# Altium PCB PCB1.PcbDoc
Units mm, origin at the board's own origin, x right, y up, seen from the top; angles counter-clockwise.
Board outline 40.5 x 40.25 mm, 4 copper layers (Component Side, Ground Plane, Power Plane, Solder Side), stack 0.844 mm thick; 26 components, 70 nets, 254 pads, 56 vias.
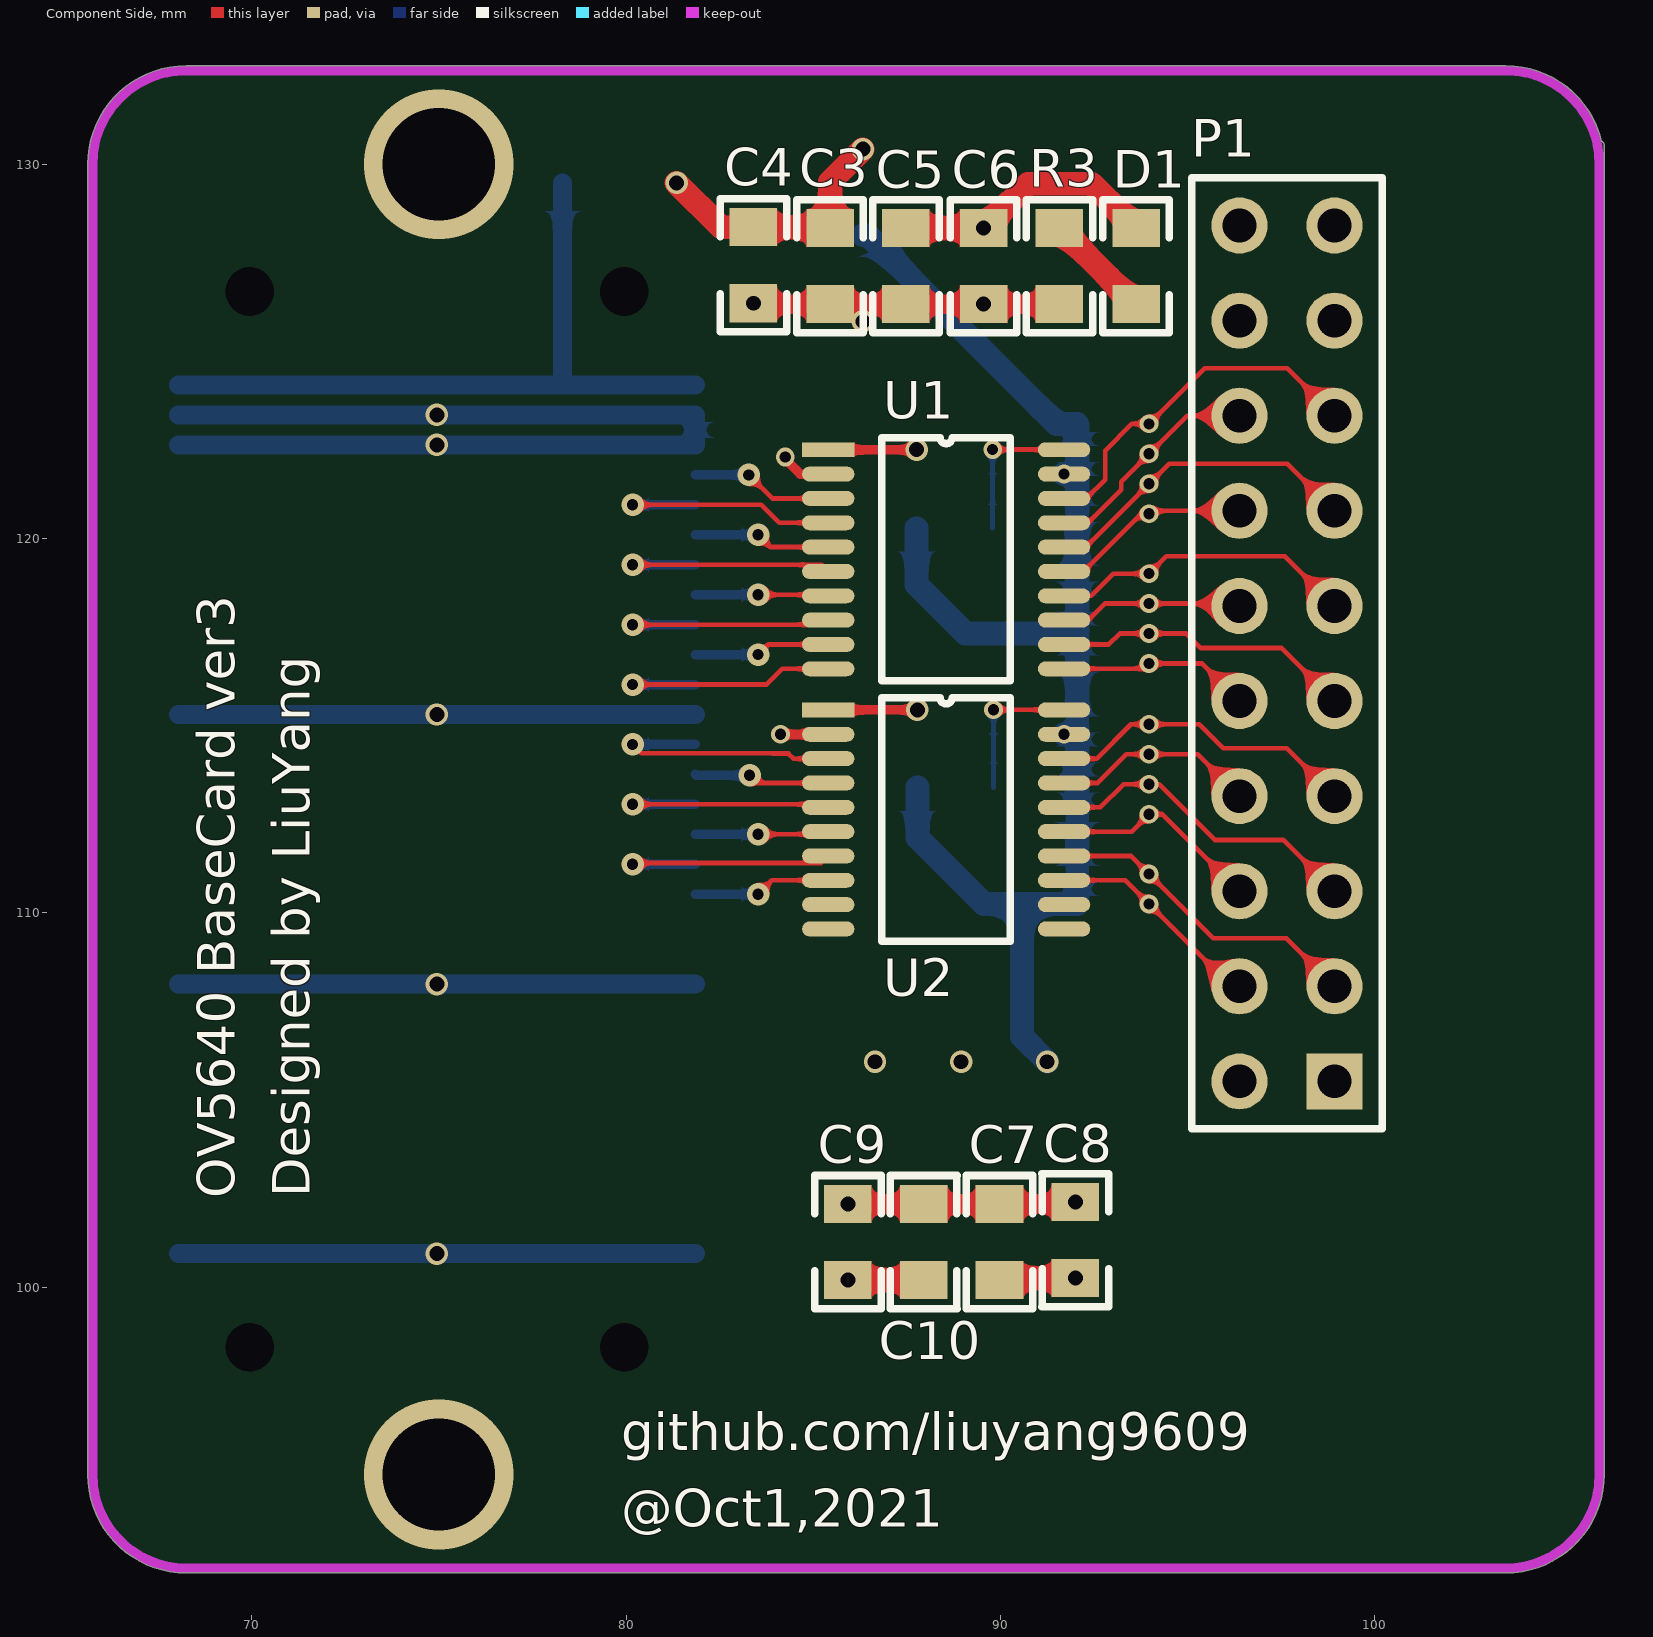
[diagram p0: Component Side view]
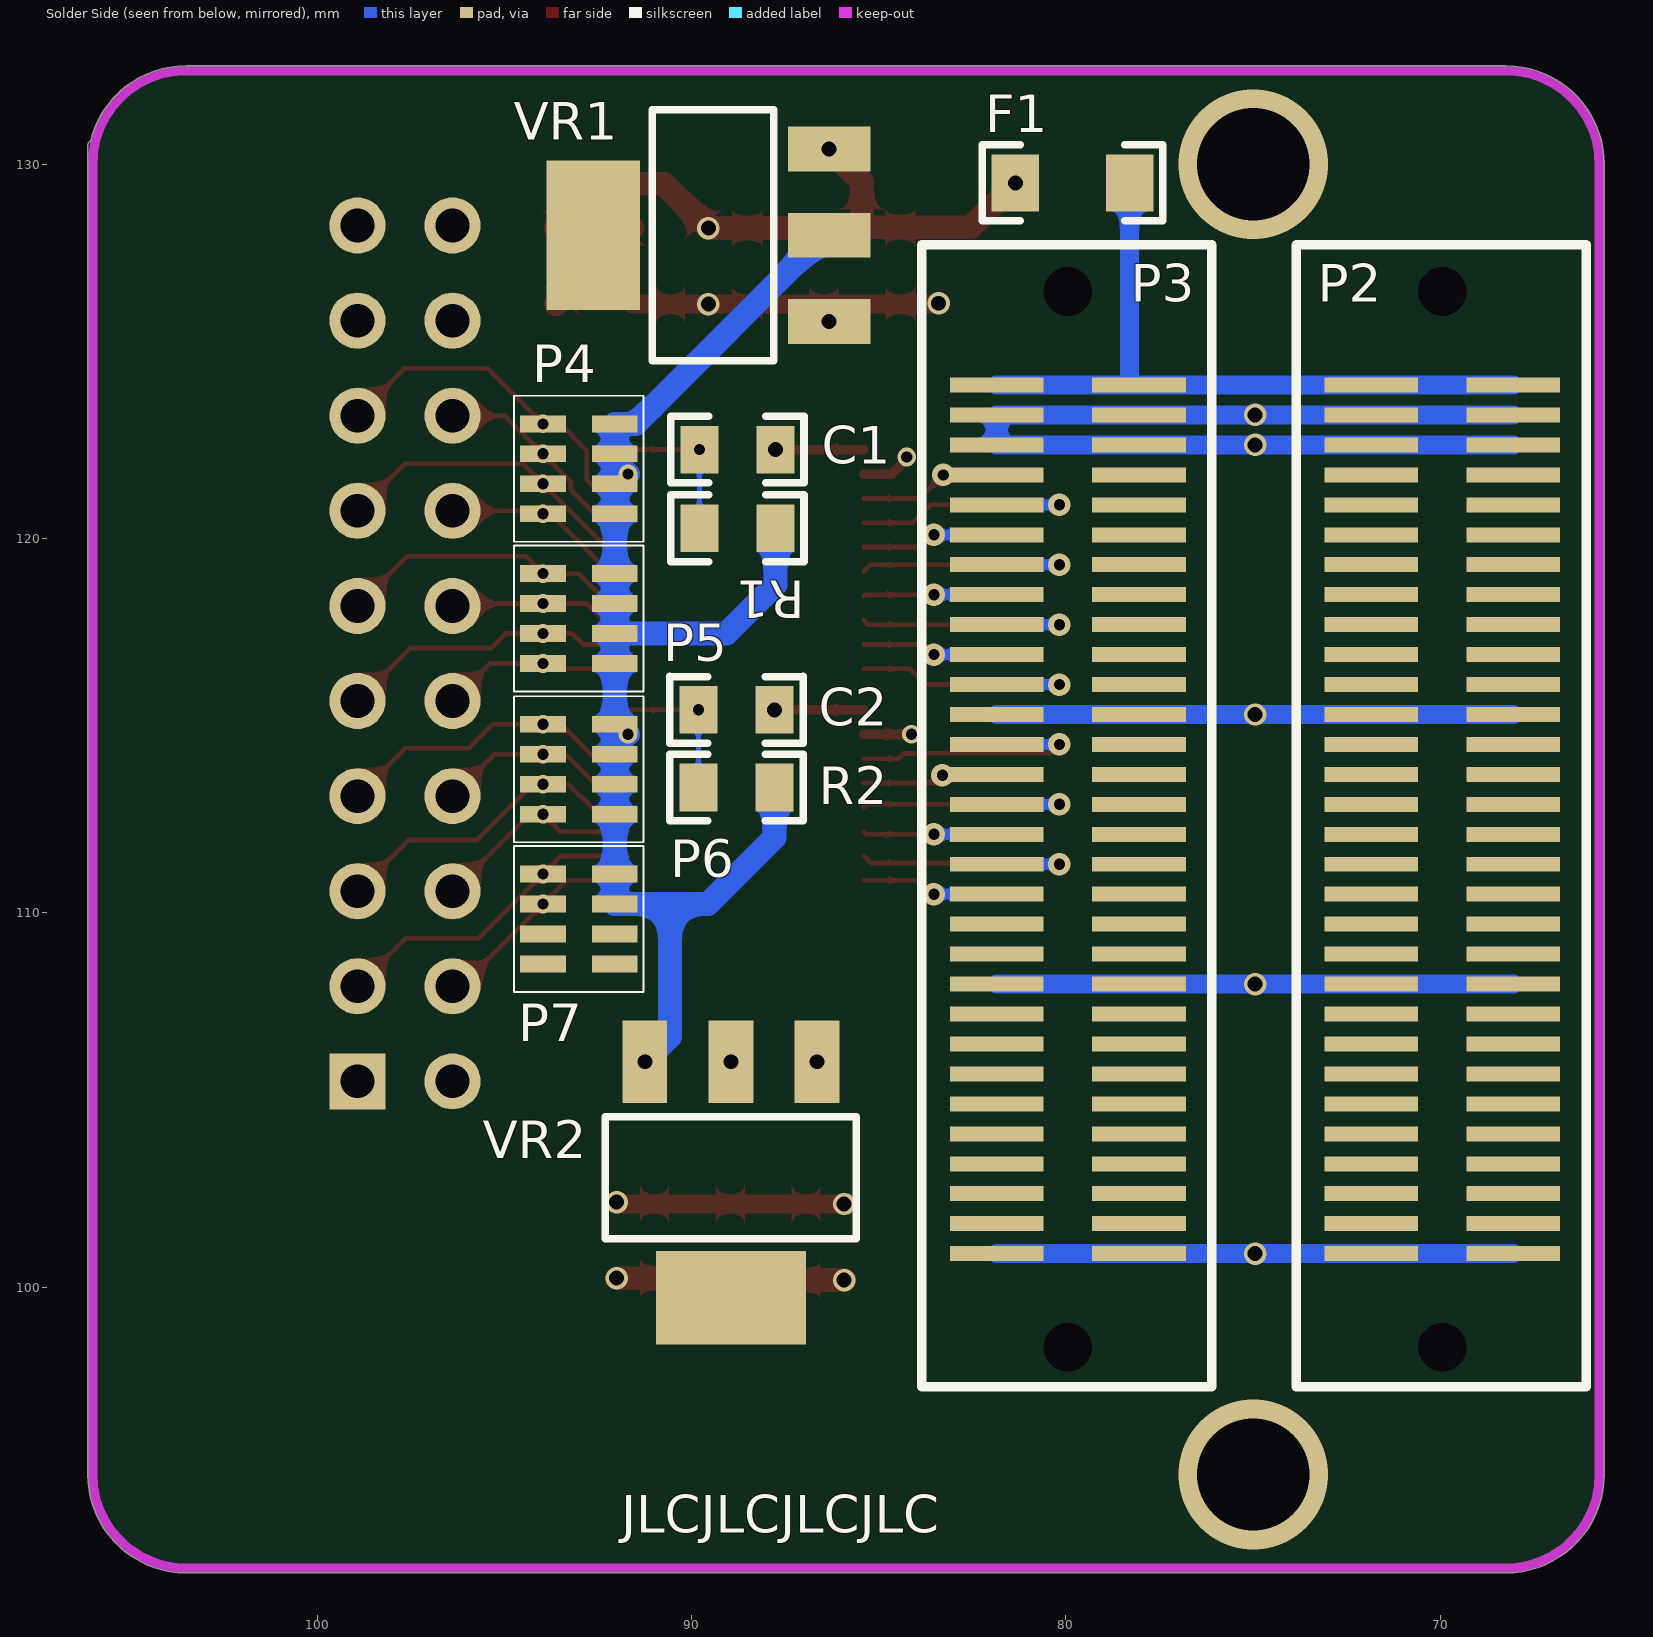
[diagram p1: Solder Side view, seen from below]
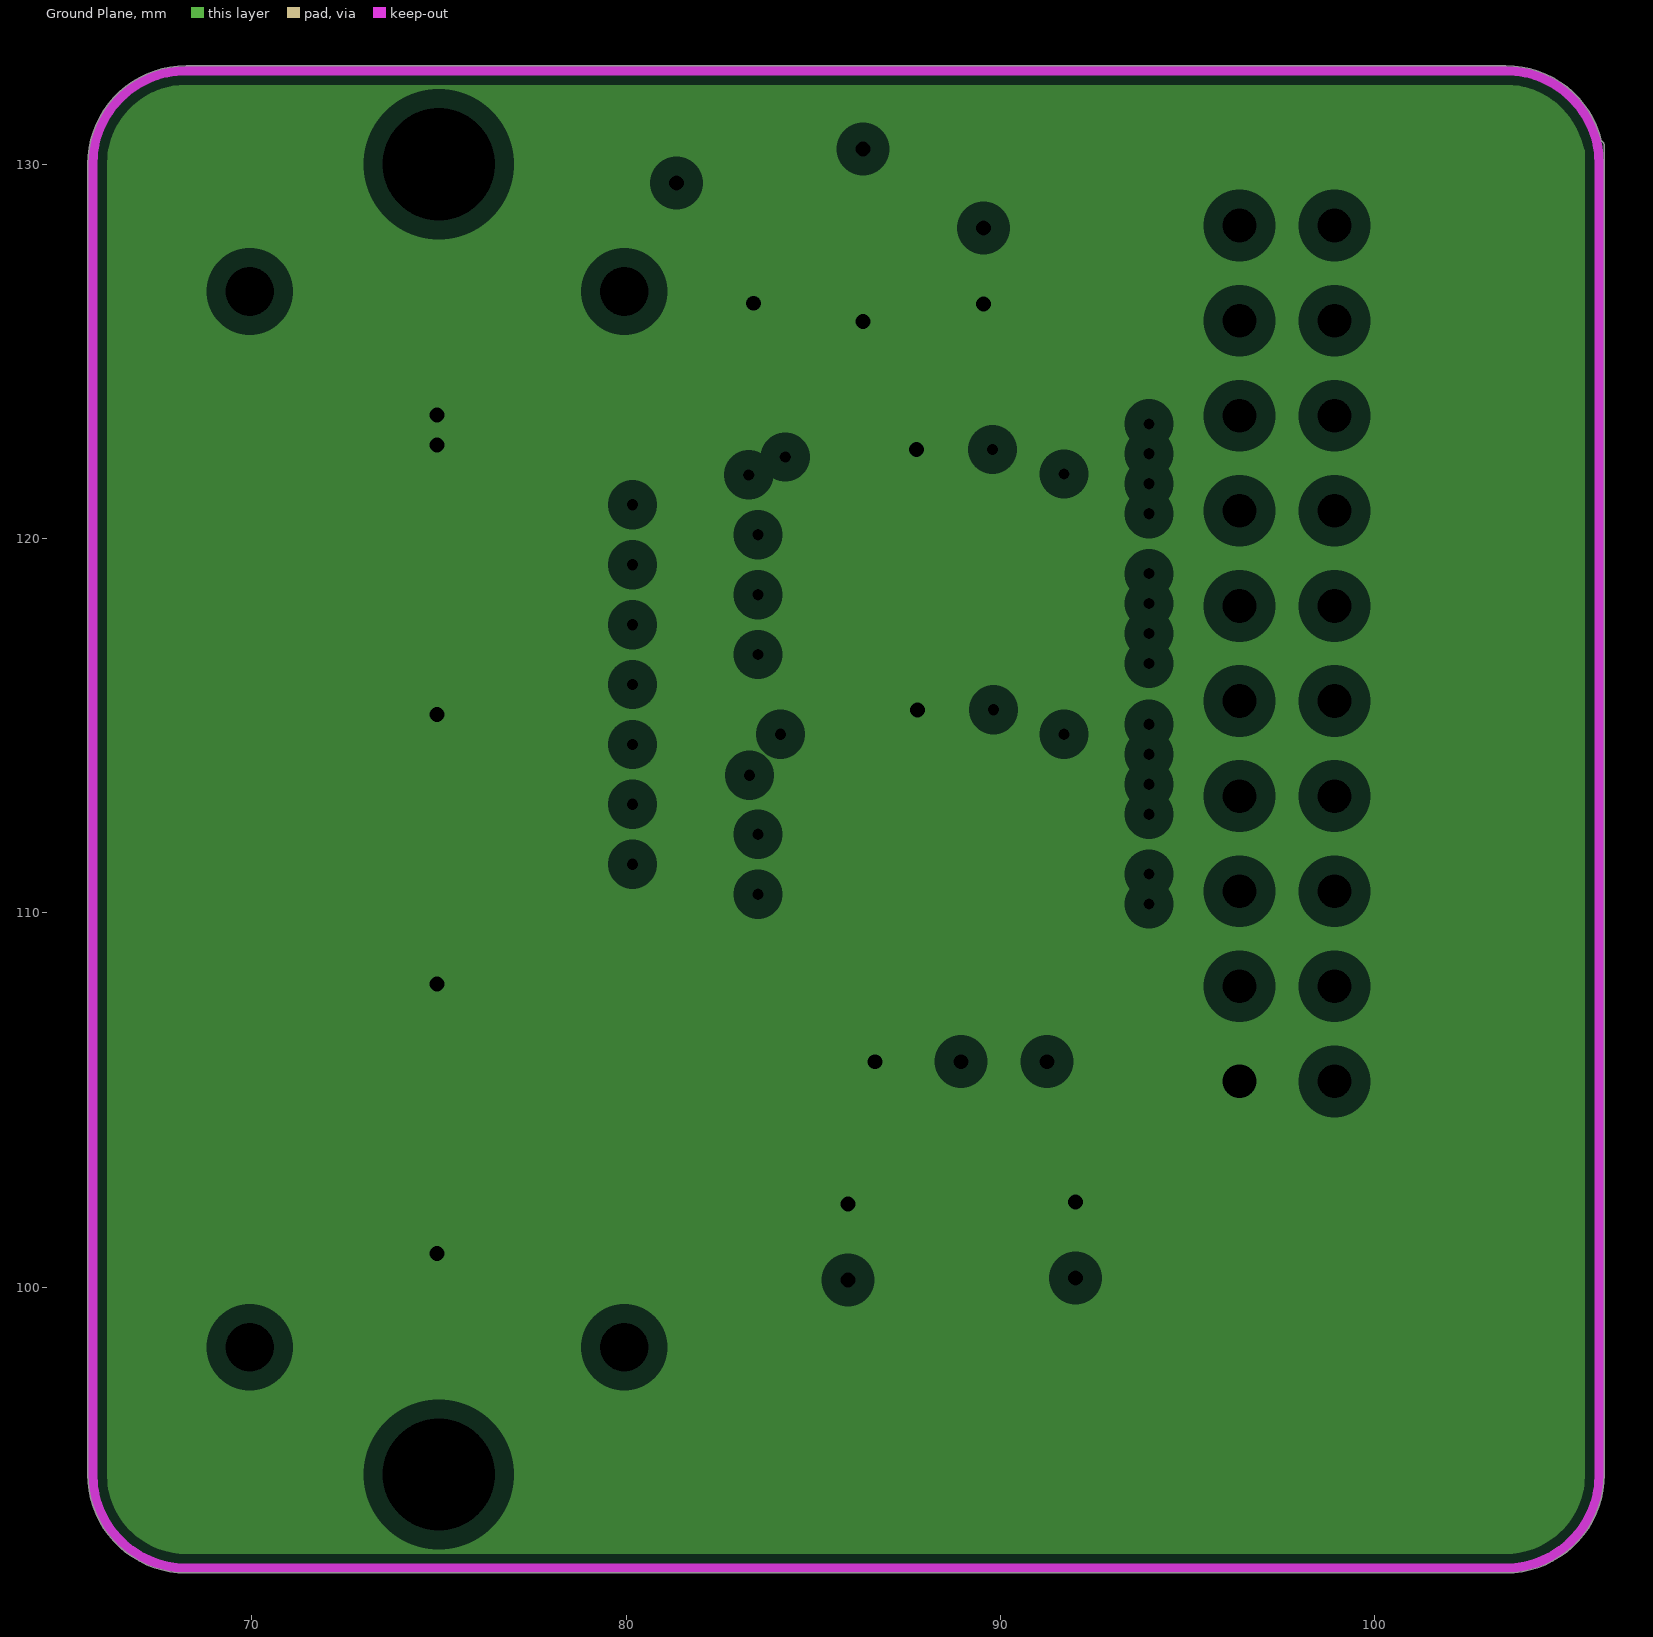
[diagram p2: Ground Plane, clearances drawn from the general rule]
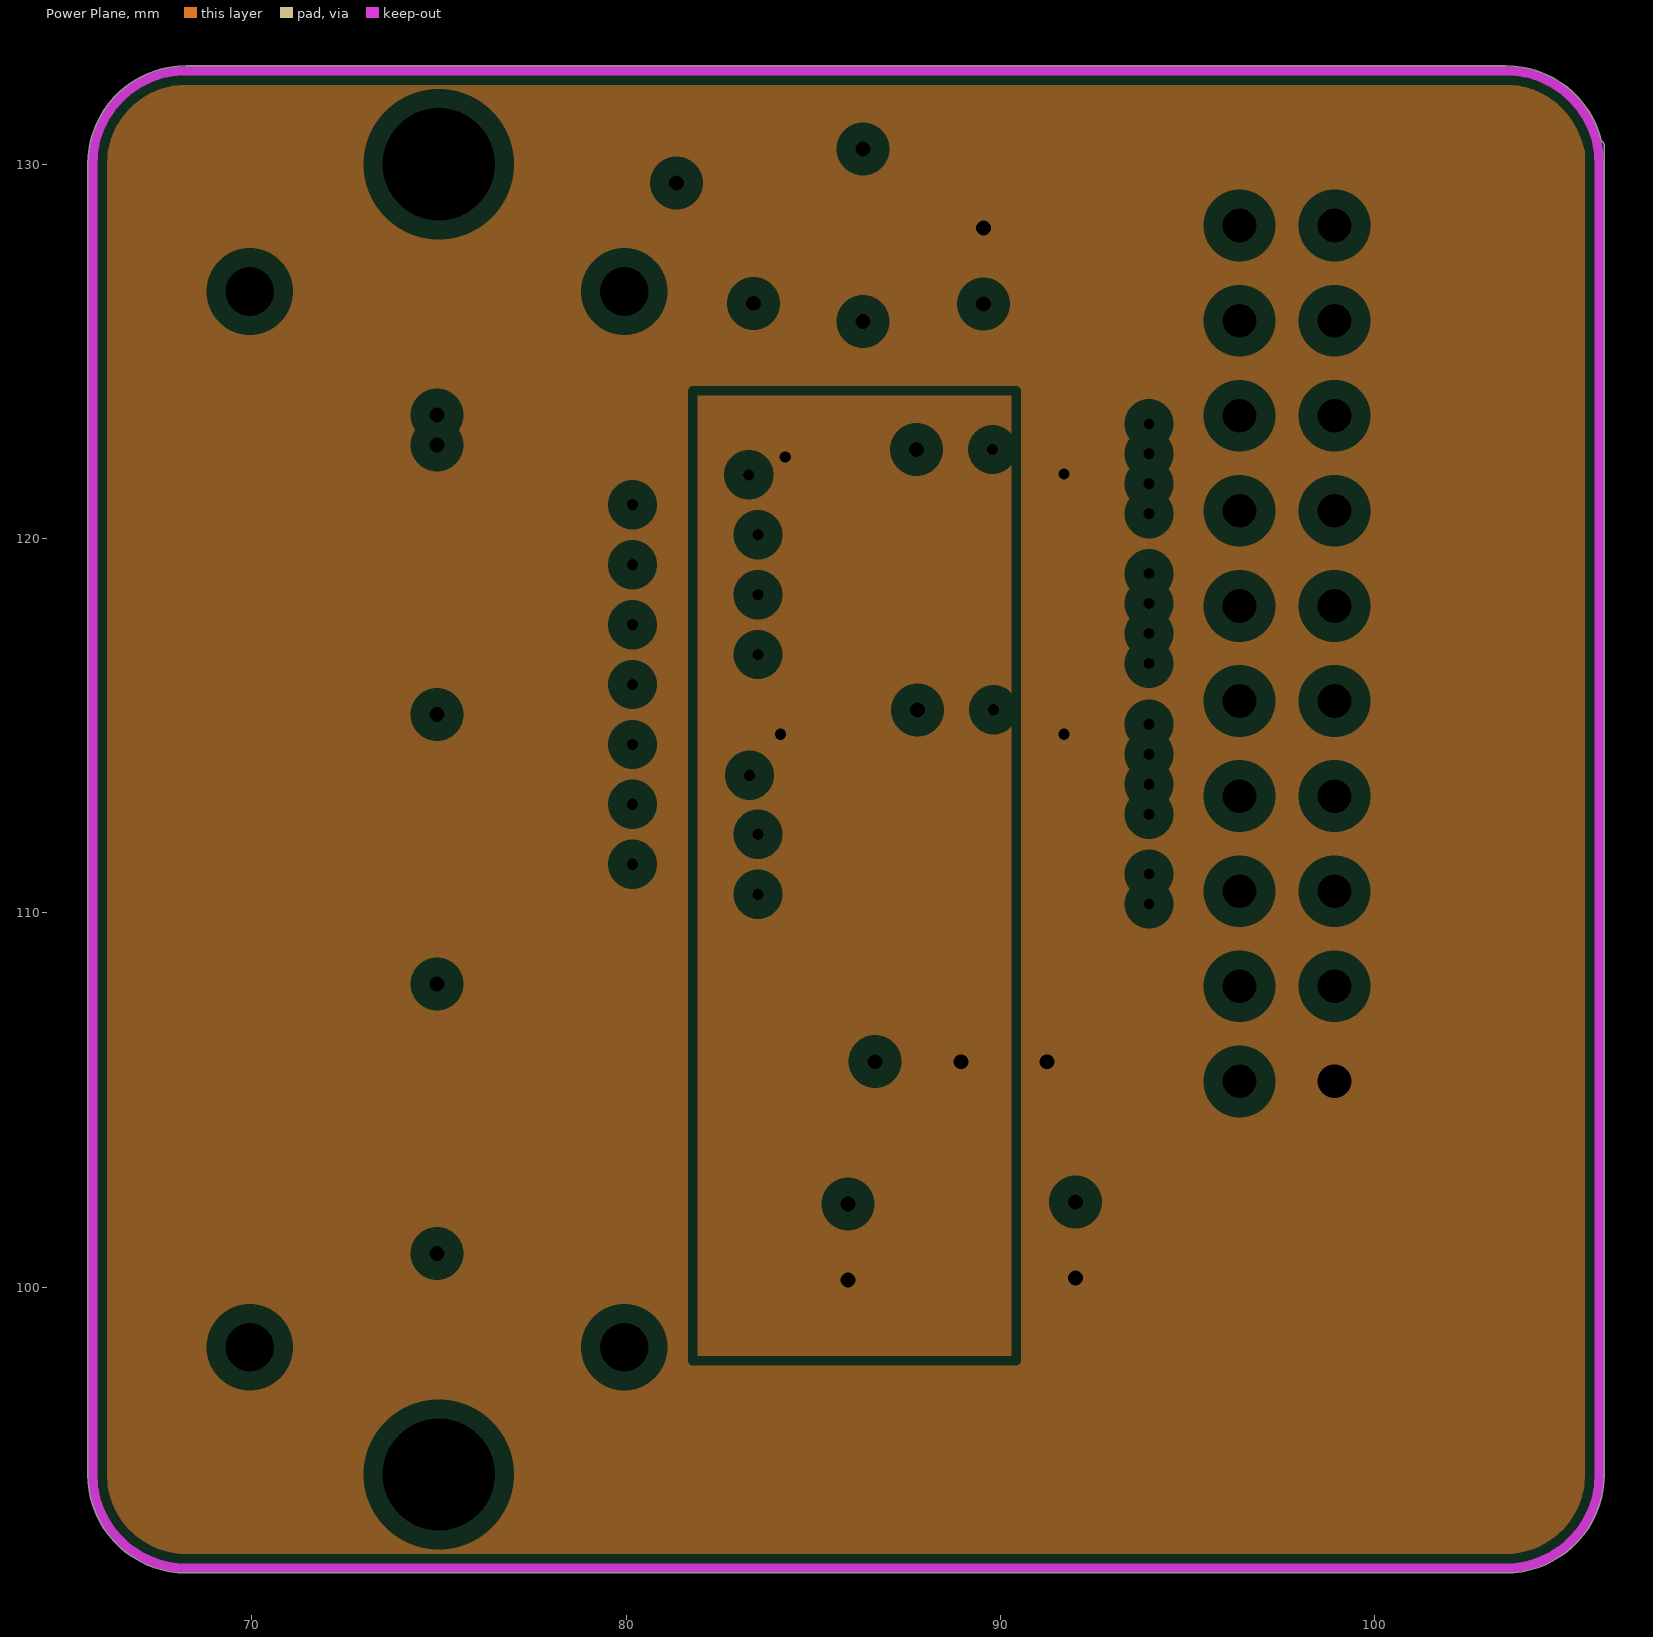
[diagram p3: Power Plane, clearances drawn from the general rule]
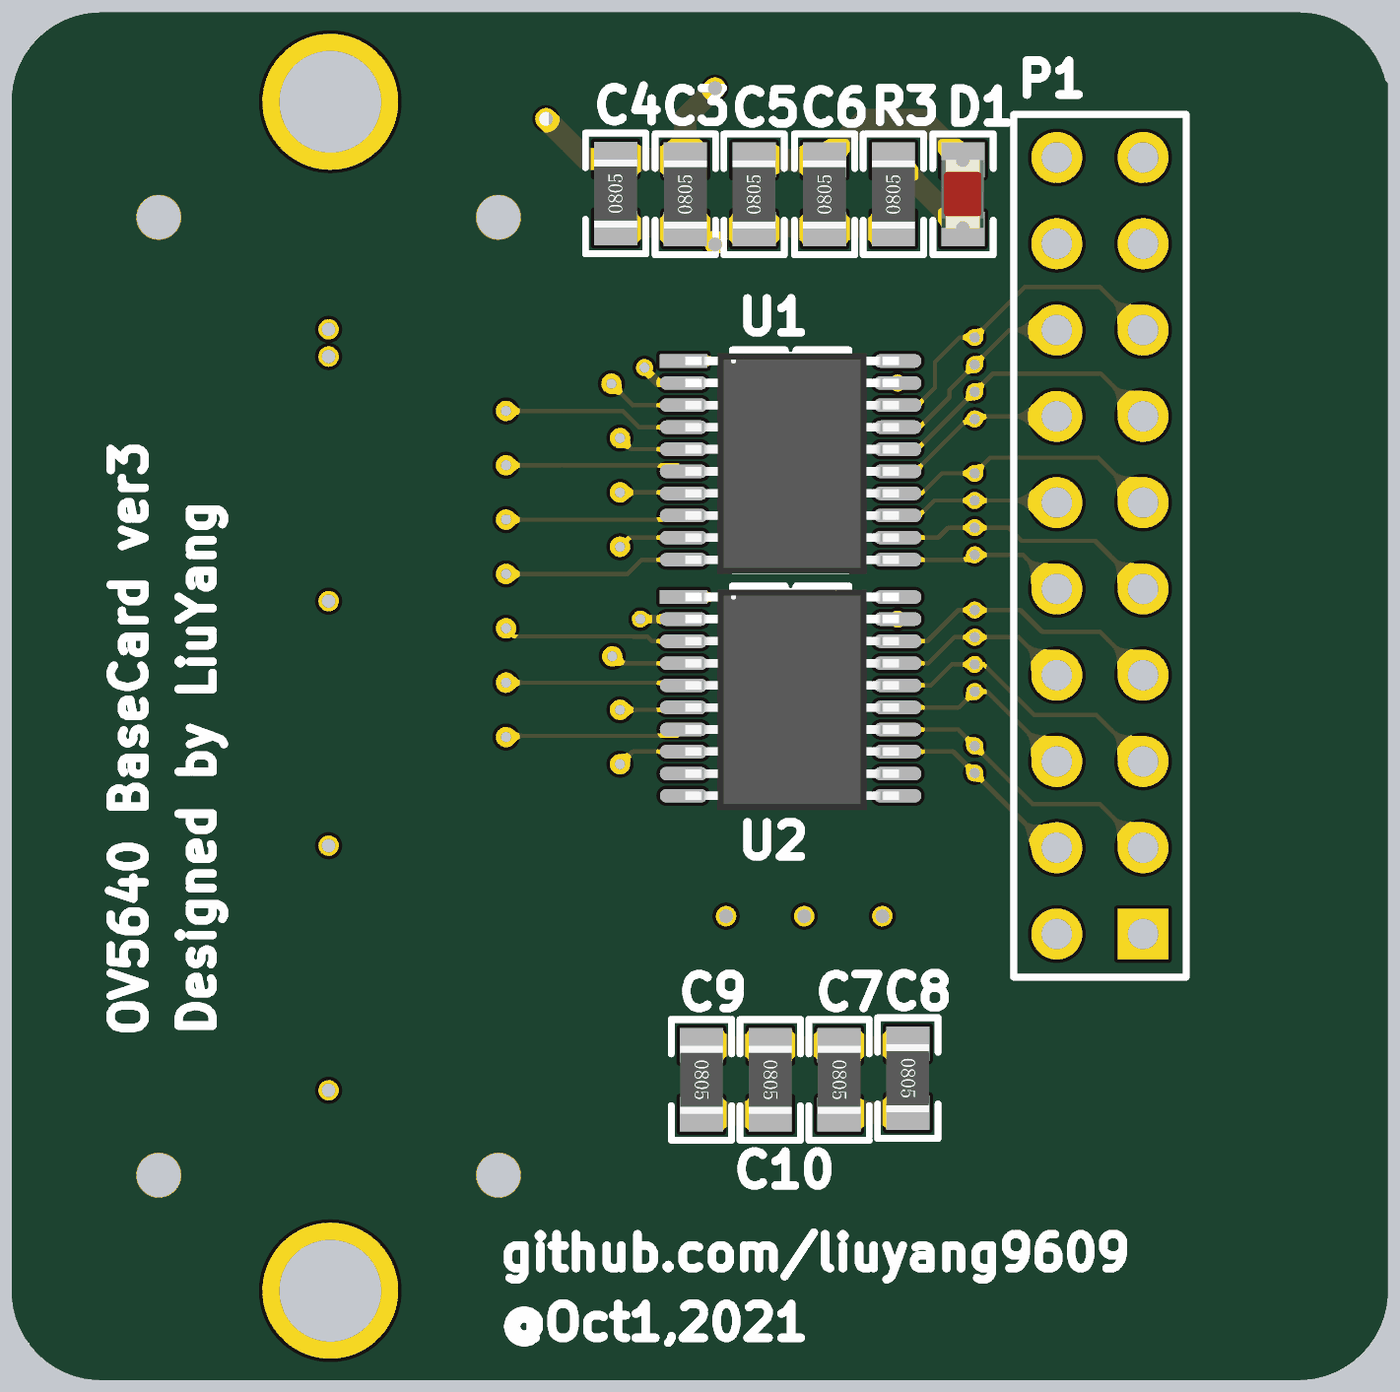
[diagram p4: 3D render of the assembled board from above, using the file's embedded part models]
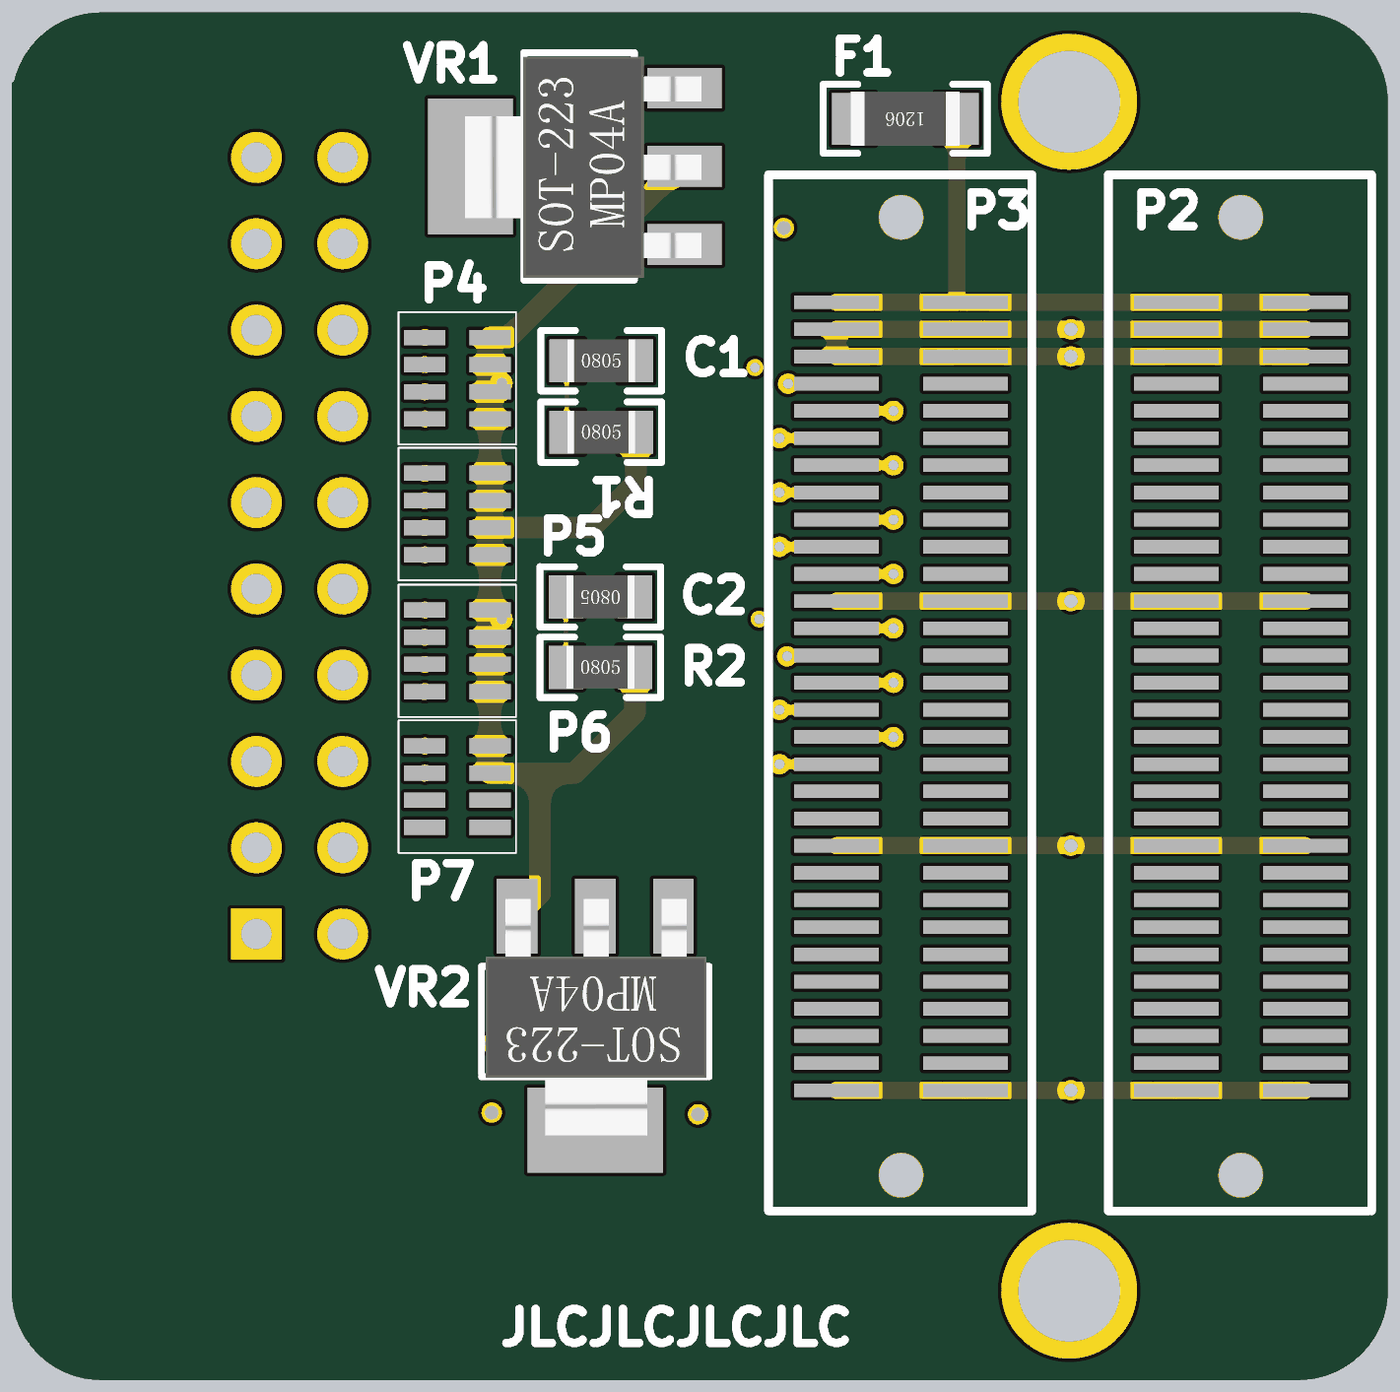
[diagram p5: 3D render of the assembled board from below, using the file's embedded part models]

## Layer stack, top to bottom
Top Solder: solder mask 0.0102, Solder Resist, Dk 3.5
Component Side: signal copper 0.0356
Dielectric 1: core 0.32, FR-4, Dk 4.8
Ground Plane: plane copper 0.036, net GND
Dielectric 3: prepreg 0.127, Dk 4.2
Power Plane: plane copper 0.036, net (Multiple Nets)
Dielectric 4: core 0.254, Dk 4.2
Solder Side: signal copper 0.0356
Bottom Solder: solder mask 0.0102, Solder Resist, Dk 3.5

## Board outline
68.25,92.373 cw(c68.25,95) 65.623,95 65.623,130 cw(c68.25,130) 68.25,132.627 103.5,132.627 cw(c103.5,130) 106.054,130.615 cw(c106,130.5) 106.127,130.5 106.127,95 cw(c103.5,95) 103.5,92.373

## Design rules (kind name [scope] priority, off if disabled: settings)
Clearance [All] p1: gap=0.2
Length [InNetClass('Class1')] p1: maxlimit=11 minlimit=10
PlaneClearance [All] p1: clearance=0.508
PlaneConnect [All] p1: planeconnectstyle=Relief reliefexpansion=0.508 reliefentries=4 reliefconductorwidth=0.254 reliefairgap=0.254
PolygonConnect [All] p1: connectstyle=Relief reliefconductorwidth=0.254 reliefentries=4 polygonreliefangle="90 Angle" airgapwidth=0.254
RoutingVias [All] p1: holewidth=0.3 width=0.6 viastyle="Through Hole" minholewidth=0.3 minwidth=0.6 maxholewidth=0.711 maxwidth=1.27
SolderMaskExpansion [All] p1: expansion=0.102
Width [All] p1: maxlimit=200 minlimit=0.127 preferedwidth=0.127
28 further rules are at their usual default settings.

## Classes and differential pairs
net class "New Class": D0 D1 D2 D3 D4 D5 D6 D7 HS PCK SCK SDA VS XCK

## Components (designator, comment, footprint, x,y, rotation, side; value= is the part's Value field where it differs from the comment)
C1 "Cap" R0805 88.775,122.375 r180 bottom
C2 "Cap" R0805 88.8,115.425 r0 bottom
C3 "Cap" R0805 85.45,127.275 r90 top
C4 "Cap" R0805 83.4,127.3 r90 top
C5 "Cap" R0805 87.475,127.275 r90 top
C6 "Cap" R0805 89.55,127.275 r90 top
C7 "Cap" R0805 89.975,101.209 r270 top
C8 "Cap" R0805 92,101.259 r270 top
C9 "Cap" R0805 85.925,101.209 r270 top
C10 "Cap" R0805 87.95,101.209 r270 top
D1 "LED0" LED0805红 93.625,127.275 r270 top
F1 "Fuse 1" R1206 79.825,129.5 r0 bottom
P1 "OV5640" HDR2X10 98.925,105.5 r90 top
P2 "BTB" BTBCON_0.8mm_60P 71.85,124.1 r180 bottom locked
P3 "BTB" BTBCON_0.8mm_60P 81.85,124.1 r180 bottom locked
P4 "Res 10K" 排阻(4位贴片) 92.1,120.675 r0 bottom
P5 "Res 10K" 排阻(4位贴片) 92.1,116.675 r0 bottom
P6 "Res 10K" 排阻(4位贴片) 92.1,112.65 r0 bottom
P7 "Res 10K" 排阻(4位贴片) 92.1,108.65 r0 bottom
R1 "Res Semi" R0805 88.775,120.275 r180 bottom
R2 "Res Semi" R0805 88.8,113.35 r180 bottom
R3 "Res1" R0805 91.575,127.275 r90 top
U1 "LSF0108" "TSSOP20 74lvc245" 88.575,119.45 r0 top locked
U2 "LSF0108" "TSSOP20 74lvc245" 88.575,112.5 r0 top locked
VR1 "AMS1117-3V3" SOT-223 89.425,128.1 r90 bottom
VR2 "AMS1117-1V8" SOT-223 88.95,102.925 r0 bottom

## Footprints (in the part's own frame and the unit in brackets; to place one, negate y for a bottom-side part, rotate by r counter-clockwise, add the part's x,y. Pads: shape width x height; smd on the part's side, far side on the other; paste and mask are expansions set on the pad)
BTBCON_0.8mm_60P [mm]
  rect 2.5x0.4 smd: 1(0,0) 2(3.8,0) 3(0,-0.8) 4(3.8,-0.8) 5(0,-1.6) 6(3.8,-1.6) 7(0,-2.4) 8(3.8,-2.4) 9(0,-3.2) 10(3.8,-3.2) 11(0,-4) 12(3.8,-4) 13(0,-4.8) 14(3.8,-4.8) 15(0,-5.6) 16(3.8,-5.6) 17(0,-6.4) 18(3.8,-6.4) 19(0,-7.2) 20(3.8,-7.2) 21(0,-8) 22(3.8,-8) 23(0,-8.8) 24(3.8,-8.8) 25(0,-9.6) 26(3.8,-9.6) 27(0,-10.4) 28(3.8,-10.4) 29(0,-11.2) 30(3.8,-11.2) 31(0,-12) 32(3.8,-12) 33(0,-12.8) 34(3.8,-12.8) 35(0,-13.6) 36(3.8,-13.6) 37(0,-14.4) 38(3.8,-14.4) 39(0,-15.2) 40(3.8,-15.2) 41(0,-16) 42(3.8,-16) 43(0,-16.8) 44(3.8,-16.8) 45(0,-17.6) 46(3.8,-17.6) 47(0,-18.4) 48(3.8,-18.4) 49(0,-19.2) 50(3.8,-19.2) 51(0,-20) 52(3.8,-20) 53(0,-20.8) 54(3.8,-20.8) 55(0,-21.6) 56(3.8,-21.6) 57(0,-22.4) 58(3.8,-22.4) 59(0,-23.2) 60(3.8,-23.2)
  round 1 hole 1.3: 61(1.9,2.5) 62(1.9,-25.7)
  silkscreen extent -2,-26.75 5.75,3.75
HDR2X10 [mm] "Connector; Header; 10x2 Position"
  rect 1.5x1.5 hole 0.9: 1(0,0)
  round 1.5 hole 0.9: 2(0,2.54) 3(2.54,0) 4(2.54,2.54) 5(5.08,0) 6(5.08,2.54) 7(7.62,0) 8(7.62,2.54) 9(10.16,0) 10(10.16,2.54) 11(12.7,0) 12(12.7,2.54) 13(15.24,0) 14(15.24,2.54) 15(17.78,0) 16(17.78,2.54) 17(20.32,0) 18(20.32,2.54) 19(22.86,0) 20(22.86,2.54)
  silkscreen extent -1.27,-1.27 24.13,3.81
LED0805红 [mil]
  rect 40x50 smd: 1(-40,0) 2(40,0)
  silkscreen extent -70,-35 70,35, body extent -40,-25 40,24, height 43
R0805 [mil]
  rect 40x50 smd: 1(-40,0) 2(40,0)
  silkscreen extent -70,-35 70,35, body extent -39,-25 39,25, height 22
R1206 [mil]
  rect 50x60 smd: 1(-60,0) 2(60,0)
  silkscreen extent -95,-40 95,40, body extent -63,-31 63,31, height 24
SOT-223 [mm]
  rect 1.2x2.2 smd: 1(-2.3,-3.1) 2(0,-3.1) 3(2.3,-3.1)
  rect 4x2.5 smd: 4(0,3.2)
  silkscreen extent -3.35,-1.62 3.35,1.62, body extent -3.28,-3.61 3.22,3.35, height 1.7
"TSSOP20 74lvc245" [mm]
  rect 1.4x0.4 smd: 1(-3.175,2.921)
  oval 1.4x0.4 smd: 2(-3.175,2.271) 3(-3.175,1.621) 4(-3.175,0.971) 5(-3.175,0.321) 6(-3.175,-0.329) 7(-3.175,-0.979) 8(-3.175,-1.629) 9(-3.175,-2.279) 10(-3.175,-2.929) 11(3.125,-2.929) 12(3.125,-2.279) 13(3.125,-1.629) 14(3.125,-0.979) 15(3.125,-0.329) 16(3.125,0.321) 17(3.125,0.971) 18(3.125,1.621) 19(3.125,2.271) 20(3.125,2.921)
  silkscreen extent -1.74,-3.25 1.69,3.25, body extent -3.12,-3.35 3.16,3.15, height 1.1
排阻(4位贴片) [mm]
  rect 1.22x0.45 smd: 1(-0.051,0.013) 2(1.869,0.013) 3(-0.051,-0.787) 4(1.869,-0.787) 5(-0.051,-1.587) 6(1.869,-1.587) 7(-0.051,-2.387) 8(1.869,-2.387)
  silkscreen extent -0.81,-3.14 2.64,0.76, body extent 0.1,-2.79 1.7,0.41, height 0.59

## Part data
C1 C2 C3 C4 C5 C6 C7 C8 C9 C10: "Capacitor"
D1: "Typical INFRARED GaAs LED"
F1: "Fuse"
P1: library part "Header 10X2", "Header, 10-Pin, Dual row"
P2 P3: library part "Header 30X2", "Header, 30-Pin, Dual row"
P4 P5 P6 P7: library part "Header 4X2", "Header, 4-Pin, Dual row"
R1 R2: "Semiconductor Resistor"
R3: "Resistor"
VR1 VR2: library part "Volt Reg", "Voltage Regulator"

## Via types
v1: diameter 0.5, hole 0.3, Component Side to Solder Side, 20 vias
v2: diameter 0.6, hole 0.4, Component Side to Solder Side, 20 vias
v3: diameter 0.6, hole 0.3, Component Side to Solder Side, 14 vias
v4: diameter 4, hole 3, Component Side to Solder Side, 2 vias

## Nets (pads, with @x,y where several pads share a name; then routed paths per layer and width w, separated by ;. In a path a pad name is that pad's centre, name@x,y a point inside that pad or via, vN(x,y) a via of type N, cw(c..) or ccw(c..) an arc to the next point about the centre after c; other vN are vias at no path point)
1V8: C9.2 C10.2 U1.2 U2.2 VR2.2 | length 4.7
  Component Side w0.254: v1(84.125,114.771) U2.2 ; v1(84.25,122.175) 84.25,122.125 84.351,122.024 84.553,121.822 84.654,121.721 U1.2
  Component Side w0.635: v2(85.925,100.193) C10.2
  other v2: 88.95,106.025
3V3: C5.2 C6.2 C7.2 C8.2 D1.1 P1.1 P4.1 P4.3 P4.5 P4.7 P5.1 P5.3 P5.5 P5.7 P6.1 P6.3 P6.5 P6.7 P7.5 P7.7 R1.2 R2.2 U1.19 U2.19 VR1.2 VR2.3 | length 47.9
  Component Side w0.635: C5.2 v2(89.55,128.291) 90.734,129.475 92.441,129.475 D1.1 ; C7.2 90.025,100.243 v2(92,100.243)
  Solder Side w0.635: VR1.2 86.457,128.1 91.494,123.062 P4.7 P4.5 P4.3 ; R1.2 87.759,118.766 89.063,117.462 P5.3 ; R2.2 87.784,112.016 89.563,110.237 90.575,110.237 ; v2(91.25,106.025) 90.575,106.7 90.575,110.237 ; v1(91.7,114.771) 91.783,114.771 P6.7 ; v1(91.7,121.721) 91.791,121.721 P4.3 ; 90.575,110.237 P7.5 P7.7 P6.1 P6.3 P6.5 P6.7 ; P6.7 P5.1 P5.3 ; P5.3 P5.5 P5.7 P4.1 P4.3
5V: F1.1 P2.1 P2.2 P3.1 P3.2 | length 18.9
  Solder Side w0.508: P2.2 P2.1 P3.2 P3.1 ; 78.301,124.351 F1.1
A12: P3.46
A13: P3.44
A14: P3.39
A15: P3.37
A16: P3.18
A17: P3.16
B13: P3.45
B14: P3.43
B15: P3.36
B16: P3.34
C12: P3.40
C13: P3.38
C16: P3.32
C17: P3.28
D0: P1.16 P4.6 U1.17 | length 6
  Component Side w0.127: U1.17 92.346,120.421 93.225,121.3 93.225,121.518 v1(93.969,122.262) 94.987,123.28 P1.16
D1: P1.15 P4.8 U1.18 | length 9.6
  Component Side w0.127: U1.18 92.296,121.071 92.8,121.575 92.8,122.35 93.512,123.062 v1(93.969,123.062) 95.457,124.55 97.655,124.55 P1.15
D2: P1.14 P4.2 U1.15 | length 5.4
  Component Side w0.127: U1.15 92.221,119.121 93.762,120.662 v1(93.969,120.662) 94.047,120.74 P1.14
D3: P1.13 P4.4 U1.16 | length 8.7
  Component Side w0.127: U1.16 92.278,119.771 v1(93.969,121.462) 94.507,122 97.665,122 P1.13
D4: P1.12 P5.6 U1.13 | length 4.9
  Component Side w0.127: U1.13 92.346,117.821 92.787,118.262 v1(93.969,118.262) 96.323,118.262 P1.12
D5: P1.11 P5.8 U1.14 | length 8.2
  Component Side w0.127: U1.14 92.421,118.471 93.012,119.062 v1(93.969,119.062) 94.432,119.525 97.6,119.525 P1.11
D6: P1.10 P5.2 U1.11 | length 5.2
  Component Side w0.127: U1.11 93.828,116.521 v1(93.969,116.662) 95.383,116.662 P1.10
D7: P1.9 P5.4 U1.12 | length 8.1
  Component Side w0.127: U1.12 92.896,117.171 93.187,117.462 v1(93.969,117.462) 94.963,117.462 95.35,117.075 97.51,117.075 P1.9
D14: P3.50
D15: P3.48
D16: P3.30
D17: P3.26
E14: P3.31 U2.6 | length 3.6
  Component Side w0.127: v3(83.527,112.1) 85.329,112.1 U2.6
  Solder Side w0.254: P3.31 v3(83.527,112.1)
E15: P3.29 U2.5 | length 6.9
  Component Side w0.127: v3(80.173,112.9) 85.321,112.9 U2.5
  Solder Side w0.254: v3(80.173,112.9) P3.29
E17: P3.14
E18: P3.12
F13: P3.54
F15: P3.22
F16: P3.35 U2.8 | length 3.7
  Component Side w0.127: v3(83.527,110.5) 83.898,110.871 U2.8
  Solder Side w0.254: P3.35 v3(83.527,110.5)
F17: P3.33 U2.7 | length 7
  Component Side w0.127: v3(80.173,111.3) 80.208,111.334 85.214,111.334 U2.7
  Solder Side w0.254: v3(80.173,111.3) P3.33
F18: P3.13 U1.6 | length 7
  Component Side w0.127: v3(80.173,119.3) 85.221,119.3 U1.6
  Solder Side w0.254: v3(80.173,119.3) P3.13
G14: P3.52
G15: P3.20
G16: P3.10
G18: P3.11 U1.5 | length 3.7
  Component Side w0.127: v3(83.527,120.1) 83.856,119.771 U1.5
  Solder Side w0.254: P3.11 v3(83.527,120.1)
G19: P3.9 U1.4 | length 7.1
  Component Side w0.127: v3(80.173,120.9) 83.613,120.9 84.092,120.421 U1.4
  Solder Side w0.254: v3(80.173,120.9) P3.9
GND: C1.2 C2.1 C3.1 C4.1 C5.1 C6.1 C7.1 C8.1 C9.1 C10.1 P1.2 P2.3 P2.4 P2.5 P2.6 P2.23 P2.24 P2.41 P2.42 P2.59 P2.60 P3.3 P3.4 P3.5 P3.6 P3.23 P3.24 P3.41 P3.42 P3.59 P3.60 R3.1 U1.1 U2.1 VR1.1 VR2.1 | length 88.8
  Component Side w0.254: U2.1 87.78,115.421 v2(87.784,115.425) ; U1.1 87.755,122.371 v2(87.759,122.375)
  Component Side w0.508: v2(83.4,126.284) 83.425,126.259 C3.1 C5.1 v2(89.55,126.259) R3.1 ; v2(85.925,102.225) C10.1 91.95,102.225 v2(92,102.275)
  Solder Side w0.508: P2.60 P2.59 P3.60 P3.59 ; P2.42 P2.41 P3.42 P3.41 ; P2.24 P2.23 P3.24 P3.23 ; P2.6 P2.5 P3.6 P3.5 P3.3 P3.4 P2.3 P2.4
  other v2: 74.95,100.9 86.65,106.025 74.95,108.1 74.95,115.3 74.95,122.5 74.95,123.3 86.325,125.8
H16: P3.8
H17: P3.21 U1.10 | length 7.1
  Component Side w0.127: v3(80.173,116.1) 83.75,116.1 84.171,116.521 U1.10
  Solder Side w0.254: v3(80.173,116.1) P3.21
H18: P3.19 U1.9 | length 3.7
  Component Side w0.127: v3(83.527,116.9) 83.798,117.171 U1.9
  Solder Side w0.254: P3.19 v3(83.527,116.9)
H19: P3.7 U1.3 | length 3.8
  Component Side w0.127: v3(83.275,121.7) 83.904,121.071 U1.3
  Solder Side w0.254: P3.7 v3(83.275,121.7)
HS: P1.6 P6.2 U2.15 | length 5.7
  Component Side w0.127: U2.15 93.503,112.171 v1(93.969,112.637) 94.328,112.637 P1.6
J15: P3.58
J16: P3.56
J17: P3.17 U1.8 | length 7
  Component Side w0.127: v3(80.173,117.7) 85.279,117.7 U1.8
  Solder Side w0.254: v3(80.173,117.7) P3.17
K15: P3.57
K17: P3.15 U1.7 | length 3.6
  Component Side w0.127: v3(83.527,118.5) 85.371,118.5 U1.7
  Solder Side w0.254: P3.15 v3(83.527,118.5)
K18: P3.53
K19: P3.51
K20: P3.49
L15: P3.55
L16: P3.27 U2.4 | length 3.6
  Component Side w0.127: v3(83.3,113.675) 83.504,113.471 U2.4
  Solder Side w0.254: P3.27 81.875,113.675 v3(83.3,113.675)
L17: P3.25 U2.3 | length 7.1
  Component Side w0.127: v3(80.173,114.5) 80.41,114.263 83.906,114.263 83.912,114.258 84.338,114.258 84.474,114.121 U2.3
  Solder Side w0.254: v3(80.173,114.5) P3.25
L20: P3.47
NetC1_1: C1.1 R1.1 U1.20 | length 4
  Component Side w0.127: v1(89.791,122.375) 91.696,122.375 U1.20
  Solder Side w0.127: R1.1 v1(89.791,122.375)
NetC2_2: C2.2 R2.1 U2.20 | length 4
  Component Side w0.127: v1(89.816,115.425) 91.696,115.425 U2.20
  Solder Side w0.127: R2.1 v1(89.816,115.425)
NetC3_2: C3.2 C4.2 F1.2 VR1.3 | length 7.1
  Component Side w0.635: v2(81.349,129.5) 82.533,128.316 C4.2 85.425,128.316 C3.2 85.45,129.525 v2(86.325,130.4)
NetD1_2: D1.2 R3.2 | length 2.9
  Component Side w0.635: R3.2 93.607,126.259 D1.2
PCK: P1.7 P6.8 U2.18 | length 8.4
  Component Side w0.127: U2.18 92.571,114.121 93.487,115.037 v1(93.969,115.037) 95.313,115.037 95.95,114.4 97.645,114.4 P1.7
SCK: P1.3 P7.8 U2.14 | length 8.7
  Component Side w0.127: U2.14 93.486,111.521 v1(93.969,111.037) 95.682,109.325 97.64,109.325 P1.3
SDA: P1.4 P7.6 U2.13 | length 5.9
  Component Side w0.127: U2.13 93.336,110.871 v1(93.969,110.237) 96.167,108.04 P1.4
VS: P1.5 P6.4 U2.16 | length 8.7
  Component Side w0.127: U2.16 92.671,112.821 93.287,113.437 v1(93.969,113.437) 94.238,113.437 95.725,111.95 97.555,111.95 P1.5
XCK: P1.8 P6.6 U2.17 | length 5.5
  Component Side w0.127: U2.17 92.596,113.471 93.362,114.237 v1(93.969,114.237) 95.268,114.237 P1.8
pads on no net: P1.17 P1.18 P1.19 P1.20 P2.7 P2.8 P2.9 P2.10 P2.11 P2.12 P2.13 P2.14 P2.15 P2.16 P2.17 P2.18 P2.19 P2.20 P2.21 P2.22 P2.25 P2.26 P2.27 P2.28 P2.29 P2.30 P2.31 P2.32 P2.33 P2.34 P2.35 P2.36 P2.37 P2.38 P2.39 P2.40 P2.43 P2.44 P2.45 P2.46 P2.47 P2.48 P2.49 P2.50 P2.51 P2.52 P2.53 P2.54 P2.55 P2.56 P2.57 P2.58 P2.61 P2.62 P3.61 P3.62 P7.1 P7.2 P7.3 P7.4 U2.9 U2.10 U2.11 U2.12 VR1.4 VR2.4
copper on no net:
  other v4: 75,95 75,130

## Polygon pours and split planes (outlines as drawn)
GND on Ground Plane (split plane): 103.685,132.111 103.868,132.087 104.048,132.047 104.225,131.991 104.395,131.92 104.559,131.835 104.715,131.736 104.862,131.623 104.998,131.498 105.123,131.362 105.236,131.215 105.335,131.059 105.42,130.895 105.491,130.725 105.547,130.548 105.553,130.518 105.554,130.516 105.555,130.513 105.558,130.496 105.56,130.496 105.583,130.42 105.617,130.356 105.617,95 105.618,94.986 105.611,94.815 105.587,94.632 105.547,94.452 105.491,94.275 105.42,94.105 105.335,93.941 105.236,93.785 105.123,93.638 104.998,93.502 104.862,93.377 104.715,93.264 104.559,93.165 104.395,93.08 104.225,93.009 104.048,92.953 103.868,92.913 103.685,92.889 103.514,92.882 103.5,92.883 68.25,92.883 68.236,92.882 68.065,92.889 67.882,92.913 67.702,92.953 67.525,93.009 67.355,93.08 67.191,93.165 67.035,93.264 66.888,93.377 66.752,93.502 66.627,93.638 66.514,93.785 66.415,93.941 66.33,94.105 66.259,94.275 66.203,94.452 66.163,94.632 66.139,94.815 66.132,94.986 66.133,95 66.133,130 66.132,130.014 66.139,130.185 66.163,130.368 66.203,130.548 66.259,130.725 66.33,130.895 66.415,131.059 66.514,131.215 66.627,131.362 66.752,131.498 66.888,131.623 67.035,131.736 67.191,131.835 67.355,131.92 67.525,131.991 67.702,132.047 67.882,132.087 68.065,132.111 68.236,132.118 68.25,132.117 103.5,132.117 103.514,132.118
1V8 on Power Plane (split plane): 90.295,98.173 81.917,98.173 81.917,123.823 90.295,123.823
3V3 on Power Plane (split plane): 103.685,132.111 103.868,132.087 104.048,132.047 104.225,131.991 104.395,131.92 104.559,131.835 104.715,131.736 104.862,131.623 104.998,131.498 105.123,131.362 105.236,131.215 105.335,131.059 105.42,130.895 105.491,130.725 105.547,130.548 105.553,130.518 105.554,130.516 105.555,130.513 105.558,130.496 105.56,130.496 105.583,130.42 105.617,130.356 105.617,95 105.618,94.986 105.611,94.815 105.587,94.632 105.547,94.452 105.491,94.275 105.42,94.105 105.335,93.941 105.236,93.785 105.123,93.638 104.998,93.502 104.862,93.377 104.715,93.264 104.559,93.165 104.395,93.08 104.225,93.009 104.048,92.953 103.868,92.913 103.685,92.889 103.514,92.882 103.5,92.883 68.25,92.883 68.236,92.882 68.065,92.889 67.882,92.913 67.702,92.953 67.525,93.009 67.355,93.08 67.191,93.165 67.035,93.264 66.888,93.377 66.752,93.502 66.627,93.638 66.514,93.785 66.415,93.941 66.33,94.105 66.259,94.275 66.203,94.452 66.163,94.632 66.139,94.815 66.132,94.986 66.133,95 66.133,130 66.132,130.014 66.139,130.185 66.163,130.368 66.203,130.548 66.259,130.725 66.33,130.895 66.415,131.059 66.514,131.215 66.627,131.362 66.752,131.498 66.888,131.623 67.035,131.736 67.191,131.835 67.355,131.92 67.525,131.991 67.702,132.047 67.882,132.087 68.065,132.111 68.236,132.118 68.25,132.117 103.5,132.117 103.514,132.118

## Keep-outs
Keep-Out Layer:
  lines w0.254: 68,92.5 103.5,92.5 ccw(c103.5,95) 106,95 106,130 ccw(c103.5,130) 103.5,132.5 68.25,132.5 ccw(c68.25,130) 65.75,130 65.75,95 ccw(c68.25,95) 68.25,92.5

## Other copper
Power Plane (plane layer: these items are gaps in the copper):
  lines w0.254: 81.788,98.044 81.788,123.952 90.424,123.952 90.424,98.044 81.788,98.044

## Silkscreen, mask and mechanical layers (free items; w line width, h text height)
Top Overlay:
  text "OV5640 BaseCard ver3" at 69.55,102.375 h1 r90
  text "Designed by LiuYang" at 71.55,102.4 h1 r90
  text "github.com/liuyang9609" at 79.875,95.65 h1
  text "@Oct1,2021" at 79.875,93.6 h1
Bottom Overlay:
  text "JLCJLCJLCJLC" at 91.875,93.45 h1
Mechanical 1:
  lines w0.254: 106,130 ccw(c103.5,130) 103.5,132.5 94.75,132.5 68.25,132.5 ccw(c68.25,130) 65.75,130 65.75,95 ccw(c68.25,95) 68.25,92.5 93.75,92.5 103.5,92.5 ccw(c103.5,95) 106,95 106,130.5